# EAGLE board Output Stage (EAGLE 5.07)
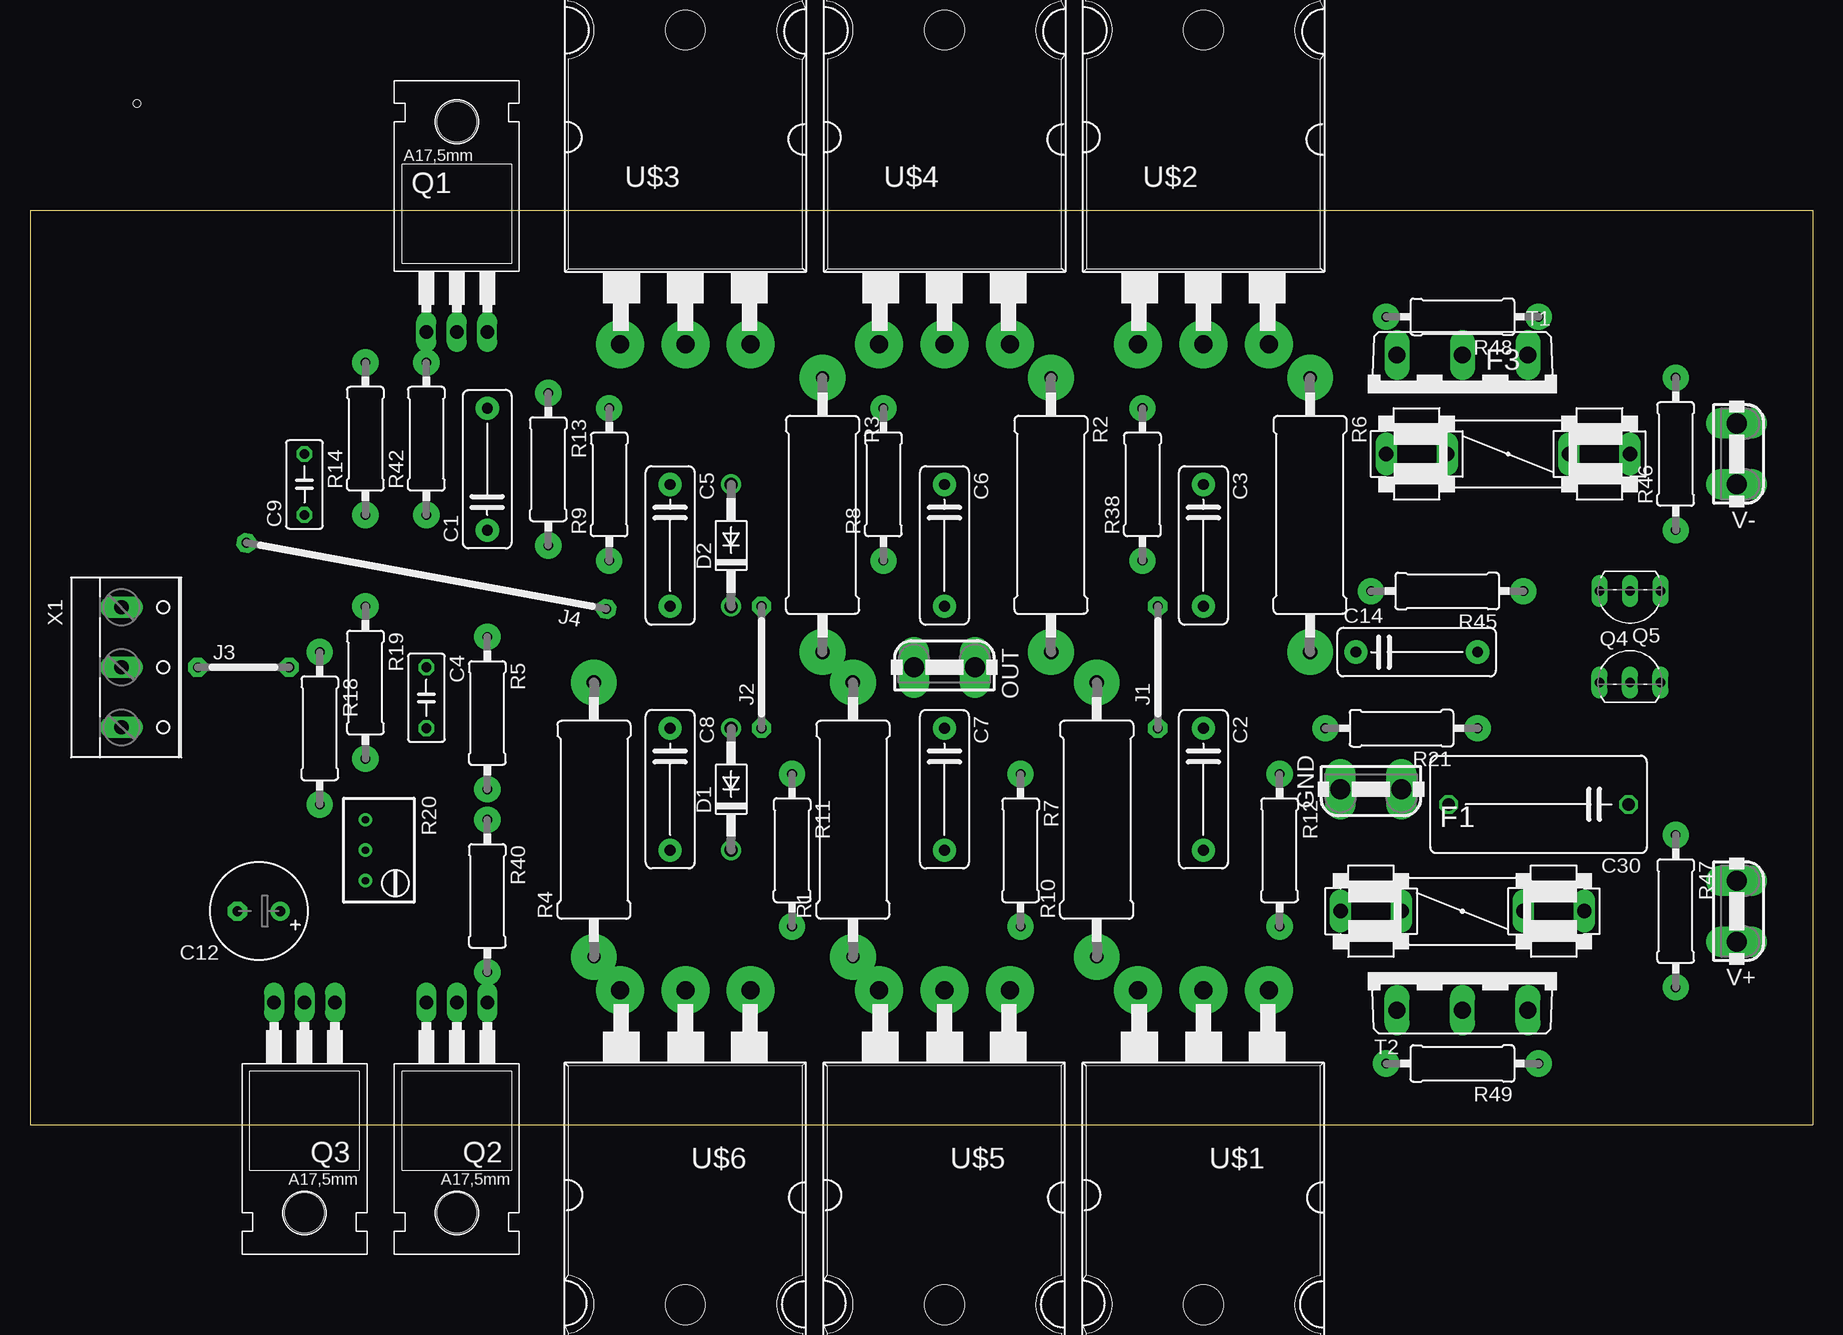
[diagram p0: board, top side]
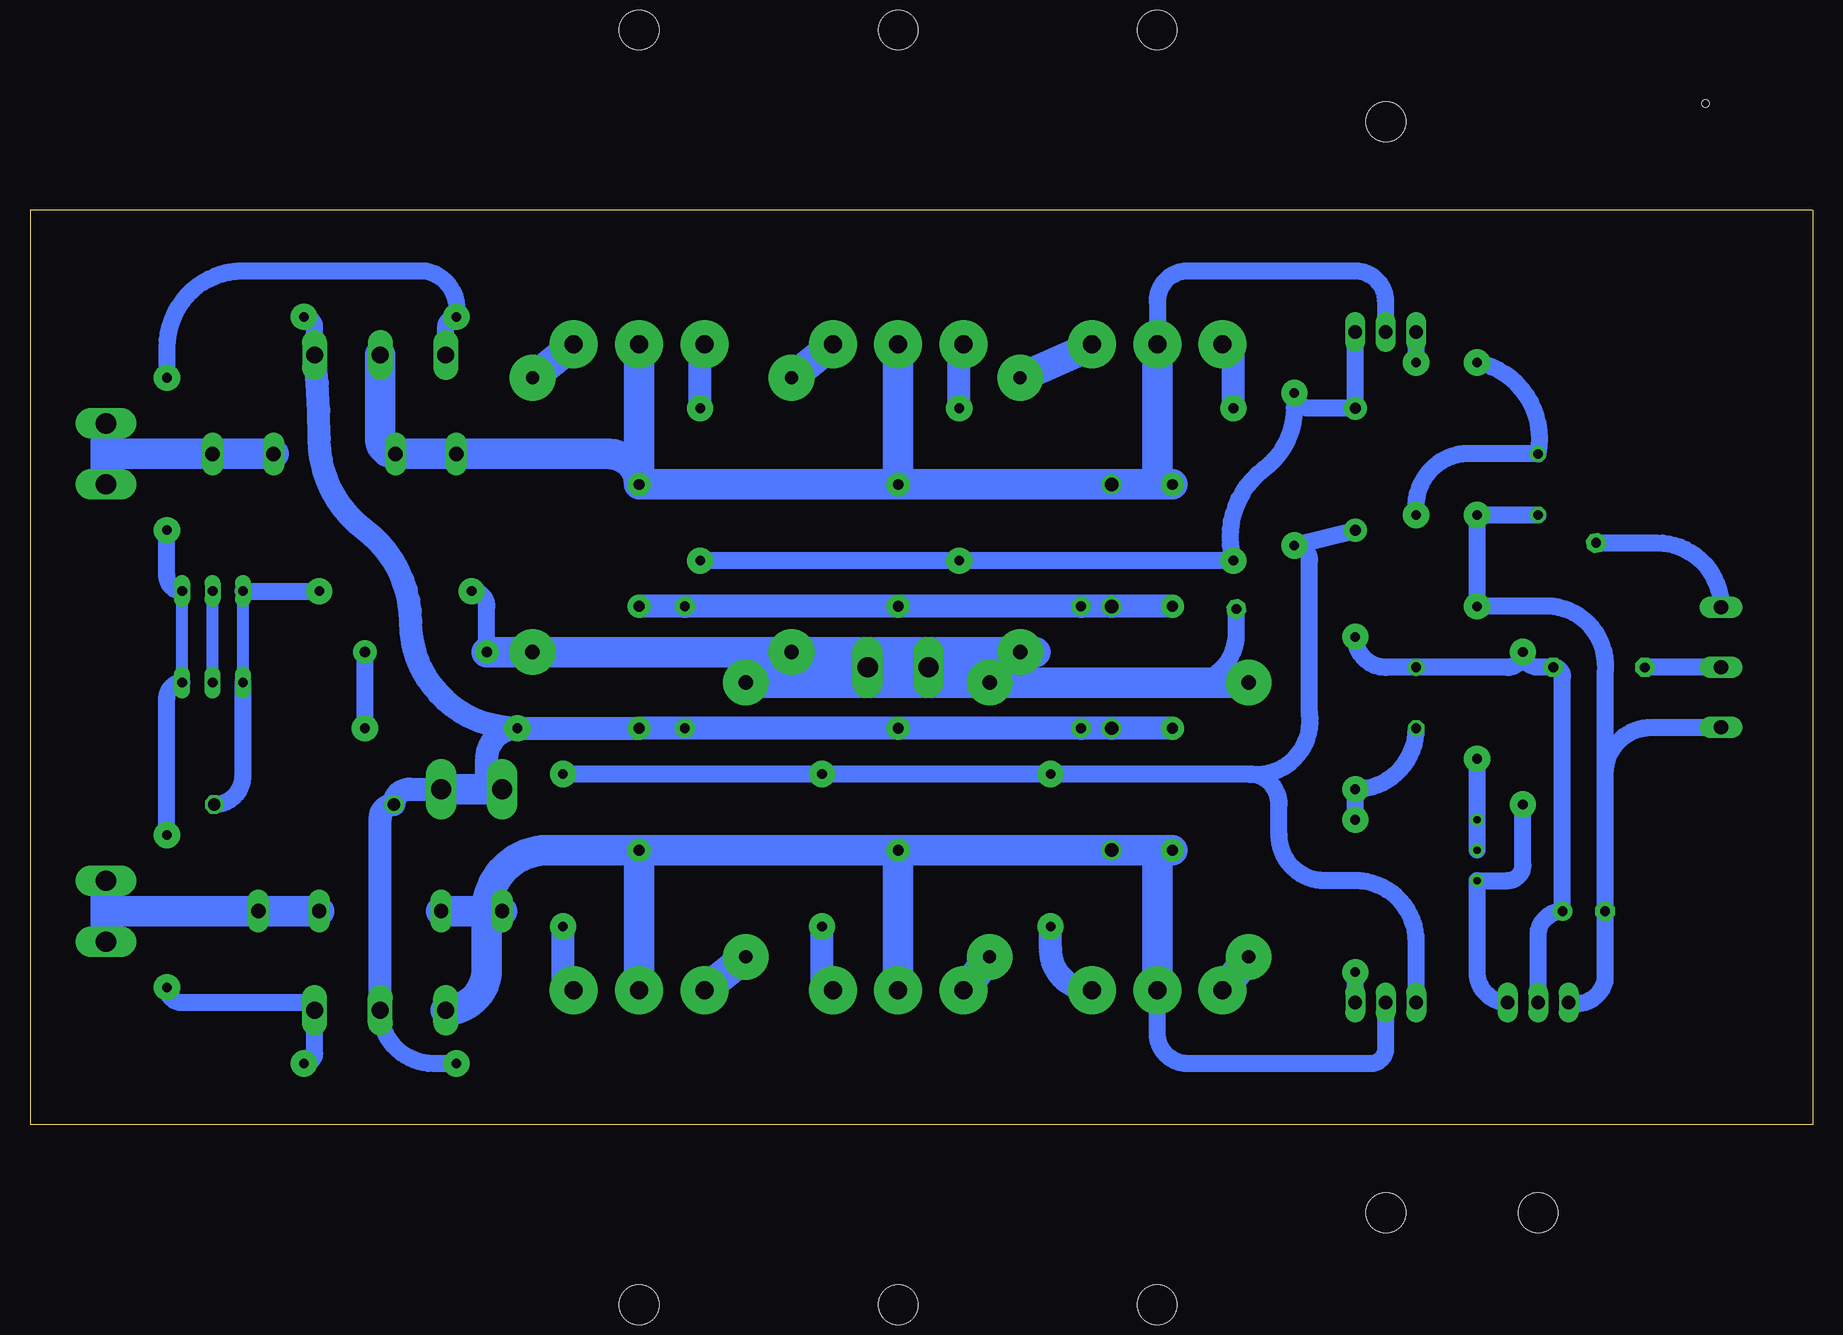
[diagram p1: board, bottom side, seen from below]

Size 148.59 x 76.2 mm. Coordinates in mm from the lower left corner, seen from the top.
Outline: 0.02,76.2 148.59,76.2 148.59,0 0.02,0
Outline: 0,76.2 0,0
Copper layers (1*16): Top 0.035mm / dielectric 1.5mm / Bottom 0.035mm
Design rules "default *": minimum track width 10mil, minimum drill 30mil, track to track 8mil, track to pad 8mil, pad to pad 8mil, via to via 8mil, smd to smd 8mil, copper to edge 40mil, drill to drill 8mil, minimum pad ring 10mil, minimum via ring 8mil, stop-mask expansion 4mil, vias tented up to drill 0mil, thermal gap 10mil
Holes 0.6 mm at 8.91,-26.67 8.91,85.09 222.27,85.09

## Footprints (pad centres in the part's own frame; a part is rotated, then mirrored left to right if it is on the bottom)
C102-043X133 = drill 0.9 pad 1.93 round: 1 -5.08,0; 2 5.08,0
C050-030X075 = drill 0.813 octagon: 1 -2.54,0; 2 2.54,0
E3,5-8 = drill 0.813 pad 1.6 round: + -1.778,0 | drill 0.813 pad 1.6 octagon: - 1.778,0
C150-084X183 = drill 1.016 octagon: 1 -7.493,0; 2 7.493,0
DO41-10 = drill 1.118 round: A 5.08,0; C -5.08,0
FUSE1 = drill 1.194 long: 1A -10.16,0; 1B -5.08,0; 2A 10.16,0; 2B 5.08,0
FASTON = drill 1.676 pad 2.54 long: 1 -2.54,0; 2 2.54,0
10 = drill 0.813 pad 1.6 octagon: 1 -5.08,0; 2 5.08,0
07 = drill 0.813 pad 1.6 octagon: 1 -3.81,0; 2 3.81,0
30 = drill 0.813 pad 1.6 octagon: 1 -15.24,0; 2 15.24,0
TO220 = drill 1.118 long: 1 -2.54,-6.35; 2 0,-6.35; 3 2.54,-6.35 | hole 3.302: 0,11.176
TO92-EBC = drill 0.813 long: B 0,-1.27; C -2.54,-1.27; E 2.54,-1.27
0617/22 = drill 1.1 pad 3.81 round: 1 -11.43,0 | drill 1.2 pad 3.81 round: 2 11.43,0
0309/12 = drill 0.8 pad 2.184 round: 1 -6.35,0; 2 6.35,0
RTRIM3299W = drill 0.61 round: 1 1.27,-2.54; 2 1.27,0; 3 1.27,2.54
TOP3S-1 = drill 1.397 long: A1 -5.461,-3.175; A2 0,-3.175; G 5.461,-3.175
TO-264 = drill 1.5 pad 4 round: B -5.45,-6.096; E 5.45,-6.096 | drill 1.499 pad 4 round: C 0,-6.096 | hole 3.3: 0,20.09
W237-103 = drill 1.194 long: 1 -5,-1.29; 2 0,-1.29; 3 5,-1.29

## Placement (x,y rotation side)
C1  .22  [C102-043X133]  38.12,54.61 90 top
C2  .1  [C102-043X133]  97.81,27.94 270 top
C3  .1  [C102-043X133]  97.81,48.26 270 top
C4  .068  [C050-030X075]  33.04,35.56 270 top
C5  .1  [C102-043X133]  53.36,48.26 270 top
C6  .1  [C102-043X133]  76.22,48.26 270 top
C7  .1  [C102-043X133]  76.22,27.94 270 top
C8  .1  [C102-043X133]  53.36,27.94 270 top
C9  .068  [C050-030X075]  22.88,53.34 90 top
C12  2.2uF  [E3,5-8]  19.07,17.78 180 top
C14  .1  [C102-043X133]  115.59,39.37 0 top
C30  22uF  [C150-084X183]  125.75,26.67 180 top
D1  1N4004  [DO41-10]  58.44,27.94 90 top
D2  1N4004  [DO41-10]  58.44,48.26 90 top
F1  4A  [FUSE1]  119.4,17.78 0 top
F3  4A  [FUSE1]  123.21,55.88 0 top
GND  GND  [FASTON]  111.78,27.94 0 top
J1  J10MM  [10]  94,38.1 90 top
J2  J10MM  [10]  60.98,38.1 90 top
J3  J7MM  [07]  17.8,38.1 0.1 top
J4  J30MM  [30]  33.04,45.72 169.6 top
OUT  QFIT  [FASTON]  76.22,38.1 180 top
Q1  PNP  [TO220]  35.58,72.39 0 top
Q2  NPN  [TO220]  35.58,3.81 180 top
Q3  NPN  [TO220]  22.88,3.81 180 top
Q4  X0202MA  [TO92-EBC]  133.37,38.1 0 top
Q5  X0202MA  [TO92-EBC]  133.37,43.18 180 top
R1  .22R  [0617/22]  68.6,25.4 90 top
R2  .22R  [0617/22]  85.11,50.8 270 top
R3  .22R  [0617/22]  66.06,50.8 270 top
R4  .22R  [0617/22]  47.01,25.4 90 top
R5  100R  [0309/12]  38.12,34.29 270 top
R6  .22R  [0617/22]  106.7,50.8 270 top
R7  4.7R  [0309/12]  82.57,22.86 270 top
R8  4.7R  [0309/12]  71.14,53.34 90 top
R9  4.7R  [0309/12]  48.28,53.34 90 top
R10  .22R  [0617/22]  88.92,25.4 90 top
R11  4.7R  [0309/12]  63.52,22.86 270 top
R12  4.7R  [0309/12]  104.16,22.86 270 top
R13  180R  [0309/12]  43.2,54.61 270 top
R14  100R  [0309/12]  27.96,57.15 90 top
R18  2.2K  [0309/12]  24.15,33.02 270 top
R19  390  [0309/12]  27.96,36.83 270 top
R20  500R  [RTRIM3299W]  29.23,22.86 180 top
R21  10R  [0309/12]  114.32,33.02 180 top
R38  4.7R  [0309/12]  92.73,53.34 90 top
R40  100R  [0309/12]  38.12,19.05 270 top
R42  100R  [0309/12]  33.04,57.15 90 top
R45  22K  [0309/12]  118.13,44.45 180 top
R46  10R  [0309/12]  137.18,55.88 90 top
R47  10R  [0309/12]  137.18,17.78 270 top
R48  220R  [0309/12]  119.4,67.31 180 top
R49  220R  [0309/12]  119.4,5.08 180 top
T1  BTA41  [TOP3S-1]  119.4,60.96 180 top
T2  BTA41  [TOP3S-1]  119.4,12.7 0 top
U$1  2SC5200  [TO-264]  97.81,5.08 180 top
U$2  2SA1943  [TO-264]  97.81,71.12 0 top
U$3  2SA1943  [TO-264]  54.63,71.12 0 top
U$4  2SA1943  [TO-264]  76.22,71.12 0 top
U$5  2SC5200  [TO-264]  76.22,5.08 180 top
U$6  2SC5200  [TO-264]  54.63,5.08 180 top
V+  QFIT  [FASTON]  142.26,17.78 90 top
V-  QFIT  [FASTON]  142.26,55.88 90 top
X1  [W237-103]  8.91,38.1 270 top

## Library data of the parts
C1-C9 C12 C14 C30 R1-R14 R18-R21 R38 R40 R42 R45-R49 = resistor
D1 D2 = diode
F1 F3 = special
GND OUT V+ V- = keystone
J1-J4 = jumper
Q1 Q2 = transistor
Q3-Q5 = transistor-npn
T1 T2 = triac
U$1-U$6 = Rudi_TO264
X1 = con-wago-500

## Nets
GND: C2.1 C7.1 C8.1 C30.2 D1.A GND.1 GND.2 J2.1 R21.2 R48.1 R49.2 T1.A1 T2.A2
N$1: R1.1 U$5.E
N$2: R2.1 U$4.E
N$3: R3.1 U$3.E
N$4: R4.1 U$6.E
N$5: R11.2 U$6.B
N$6: C4.2 R5.2 R40.1
N$7: R7.2 U$5.B
N$8: R8.2 U$4.B
N$9: R9.2 U$3.B
N$10: Q2.1 R40.2
N$11: C9.2 R14.2 R42.1
N$12: C2.2 C7.2 C8.2 D1.C F1.1A Q2.2 T2.A1 U$1.C U$5.C U$6.C
N$15: C9.1 C12.- Q3.3 R14.1 R19.1 X1.3
N$16: F1.2A V+.1 V+.2
N$17: F3.2A V-.1 V-.2
N$18: C1.2 Q1.3 R8.1 R9.1 R13.1 R38.1
N$19: C1.1 Q2.3 R7.1 R11.1 R12.1 R13.2
N$20: J3.1 X1.2
N$21: R19.2 R20.1 R20.2
N$22: R6.1 U$2.E
N$24: R10.1 U$1.E
N$25: Q3.1 R18.2 R20.3
N$26: R38.2 U$2.B
N$27: R12.2 U$1.B
N$28: J4.2 X1.1
N$31: C4.1 C12.+ J3.2 Q3.2 R5.1 R18.1
N$58: C14.2 R21.1
N$61: Q1.1 R42.2
N$67: Q4.B Q5.B
N$72: Q4.E Q5.C R46.1 R47.1
N$73: C30.1 Q4.C Q5.E R45.1
N$74: C3.1 C5.1 C6.1 D2.A F3.1A Q1.2 T1.A2 U$2.C U$3.C U$4.C
N$77: R46.2 R48.2 T1.G
N$78: R47.2 R49.1 T2.G
PE: C3.2 C5.2 C6.2 D2.C J1.2 J2.2
VCCIO: C14.1 J4.1 OUT.1 OUT.2 R1.2 R2.2 R3.2 R4.2 R6.2 R10.2 R45.2

## Tracks (layer width: path | path; a pad name or v marks a point on that pad's centre or on a via)
GND
  Bottom 1.422: R48.1 arc90 124.86,66.42 T1.A1 | T2.A2 arc-90 114.95,5.08 R49.2
  Bottom 1.93: C8.1 D1.A J2.1 C7.1 C2.1 R21.2 | R21.2 arc-90 110.51,30.48 110.51,27.94 | R21.2 arc90 116.86,41.91 arc-53 120.67,49.53 arc53 124.48,57.15 arc-6 T1.A1 | GND.2 116.99,27.94 arc-90 C30.2 arc-90 119.4,25.53 T2.A2
  Bottom 2.54: GND.1 110.51,27.94 GND.2 111.78,27.94
N$1
  Bottom 2.54: R1.1 70.52,11.43 arc-90 U$5.E
N$2
  Bottom 2.54: R2.1 81.92,64.77 arc-90 U$4.E
N$3
  Bottom 2.54: R3.1 60.33,64.77 arc-90 U$3.E
N$4
  Bottom 2.54: R4.1 48.93,11.43 arc-90 U$6.E
N$5
  Bottom 1.93: R11.2 63.52,14.62 arc-90 U$6.B
N$6
  Bottom 1.422: R40.1 R5.2 arc-90 C4.2
N$7
  Bottom 1.93: R7.2 82.57,12.08 arc-90 U$5.B
N$8
  Bottom 1.93: R8.2 71.14,64.65 arc90 U$4.B
N$9
  Bottom 1.93: R9.2 48.28,64.65 arc90 U$3.B
N$10
  Bottom 1.422: Q2.1 R40.2
N$11
  Bottom 1.422: R14.2 arc90 C9.2 29.23,55.88 arc-90 R42.1
N$12
  Bottom 1.422: Q2.2 35.58,6.35 arc90 36.85,5.08 52.09,5.08 arc90 54.63,7.62 54.63,11.43
  Bottom 2.54: U$6.C 54.63,11.43 54.63,22.86 C8.2 D1.C C7.2 | C7.2 C2.2 | C2.2 U$1.C | C7.2 U$5.C | C2.2 105.43,22.86 arc-90 110.51,17.78 | 110.51,17.78 114.32,17.78 | 110.51,17.78 F1.1A | T2.A1 arc-90 110.51,12.95 110.51,17.78
N$15
  Bottom 1.422: Q3.3 arc-90 17.29,11.94 C12.- 17.29,29.21 | 17.29,29.21 17.29,37.59 arc-90 21.61,43.18 R19.1 R14.1 C9.1 | X1.3 13.4,33.1 arc-90 17.29,29.21
N$16
  Bottom 2.54: 124.48,17.78 F1.2A 142.26,17.78 | 142.26,17.78 V+.2 | 142.26,17.78 V+.1
N$17
  Bottom 2.54: 128.29,55.88 F3.2A 142.26,55.88 V-.2 V-.1
N$18
  Bottom 1.422: R38.1 R8.1 R9.1 arc69 45.74,54.61 arc-53 43.2,59.69 R13.1 arc-90 41.93,59.69 C1.2 Q1.3
N$19
  Bottom 1.422: R12.1 R7.1 R11.1 47.01,29.21 | 47.01,29.21 45.74,29.21 arc-90 41.93,34.29 41.93,46.99 arc-90 R13.2 C1.1 | Q2.3 33.04,15.24 arc-90 38.12,20.32 40.66,20.32 arc90 44.47,24.13 44.47,26.67 arc-90 47.01,29.21
N$20
  Bottom 1.422: X1.2 J3.1 arc-90 J3.1
N$21
  Bottom 1.422: R19.2 R20.1 R20.2
N$22
  Bottom 2.54: R6.1 103.51,64.77 arc-90 U$2.E
N$24
  Bottom 2.54: R10.1 92.11,11.43 arc-90 U$1.E
N$25
  Bottom 1.422: Q3.1 arc90 27.96,12.7 R20.3 25.42,20.32 arc-90 24.15,21.59 R18.2
N$26
  Bottom 1.93: R38.2 92.73,64.65 arc90 U$2.B
N$27
  Bottom 1.93: R12.2 104.16,12.08 arc-90 U$1.B
N$28
  Bottom 1.422: J4.2 12.99,48.47 arc90 X1.1
N$31
  Bottom 1.422: Q3.2 22.88,15.75 arc90 C12.+ 20.85,37.34 arc-90 J3.2 22.89,38.11 arc90 R18.1 arc90 25.42,38.1 C4.1 35.58,38.1 arc90 R5.1
N$58
  Bottom 1.422: R21.1 C14.2
N$61
  Bottom 1.422: R42.2 Q1.1
N$67
  Bottom 1.016: Q4.B Q5.B
N$72
  Bottom 1.016: Q4.E Q5.C
  Bottom 1.422: Q4.E arc-90 137.18,35.56 R47.1 | Q5.C arc90 137.18,45.72 R46.1
N$73
  Bottom 1.016: Q4.C Q5.E
  Bottom 1.422: Q5.E R45.1 | C30.1 arc-90 130.83,29.08 Q4.C
N$74
  Bottom 1.422: Q1.2 35.58,68.58 arc-90 38.12,71.12 52.09,71.12 arc-90 54.63,68.58 54.63,64.77
  Bottom 2.54: C3.1 U$2.C | C6.1 C3.1 | C6.1 U$4.C | C6.1 D2.A C5.1 arc90 54.63,54.61 54.63,64.77 U$3.C | C3.1 arc-90 100.35,55.88 F3.1A 118.13,55.88 arc90 119.4,57.15 T1.A2
N$77
  Bottom 1.422: T1.G 113.94,66.42 arc90 R48.2 arc-90 115.59,71.12 130.83,71.12 arc-90 137.18,64.77 R46.2
N$78
  Bottom 1.422: R49.1 arc-90 124.86,5.97 T2.G arc-90 125.5,10.16 135.91,10.16 arc90 R47.2
PE
  Bottom 1.93: C5.2 D2.C J2.2 C6.2 J1.2 C3.2
VCCIO
  Bottom 1.422: R45.2 arc90 110.51,43.18 C14.1 | J4.1 48.03,40.89 arc90 52.09,36.83
  Bottom 2.54: R4.2 52.09,36.83 R1.2 | R1.2 R10.2 | R1.2 arc90 64.79,39.37 R3.2 R2.2 R6.2 C14.1 | OUT.1 OUT.2 arc-90 72.41,36.83 R1.2